# EAGLE board 1 Strain Gauge Board (EAGLE 9.1.3), part 1 of 2
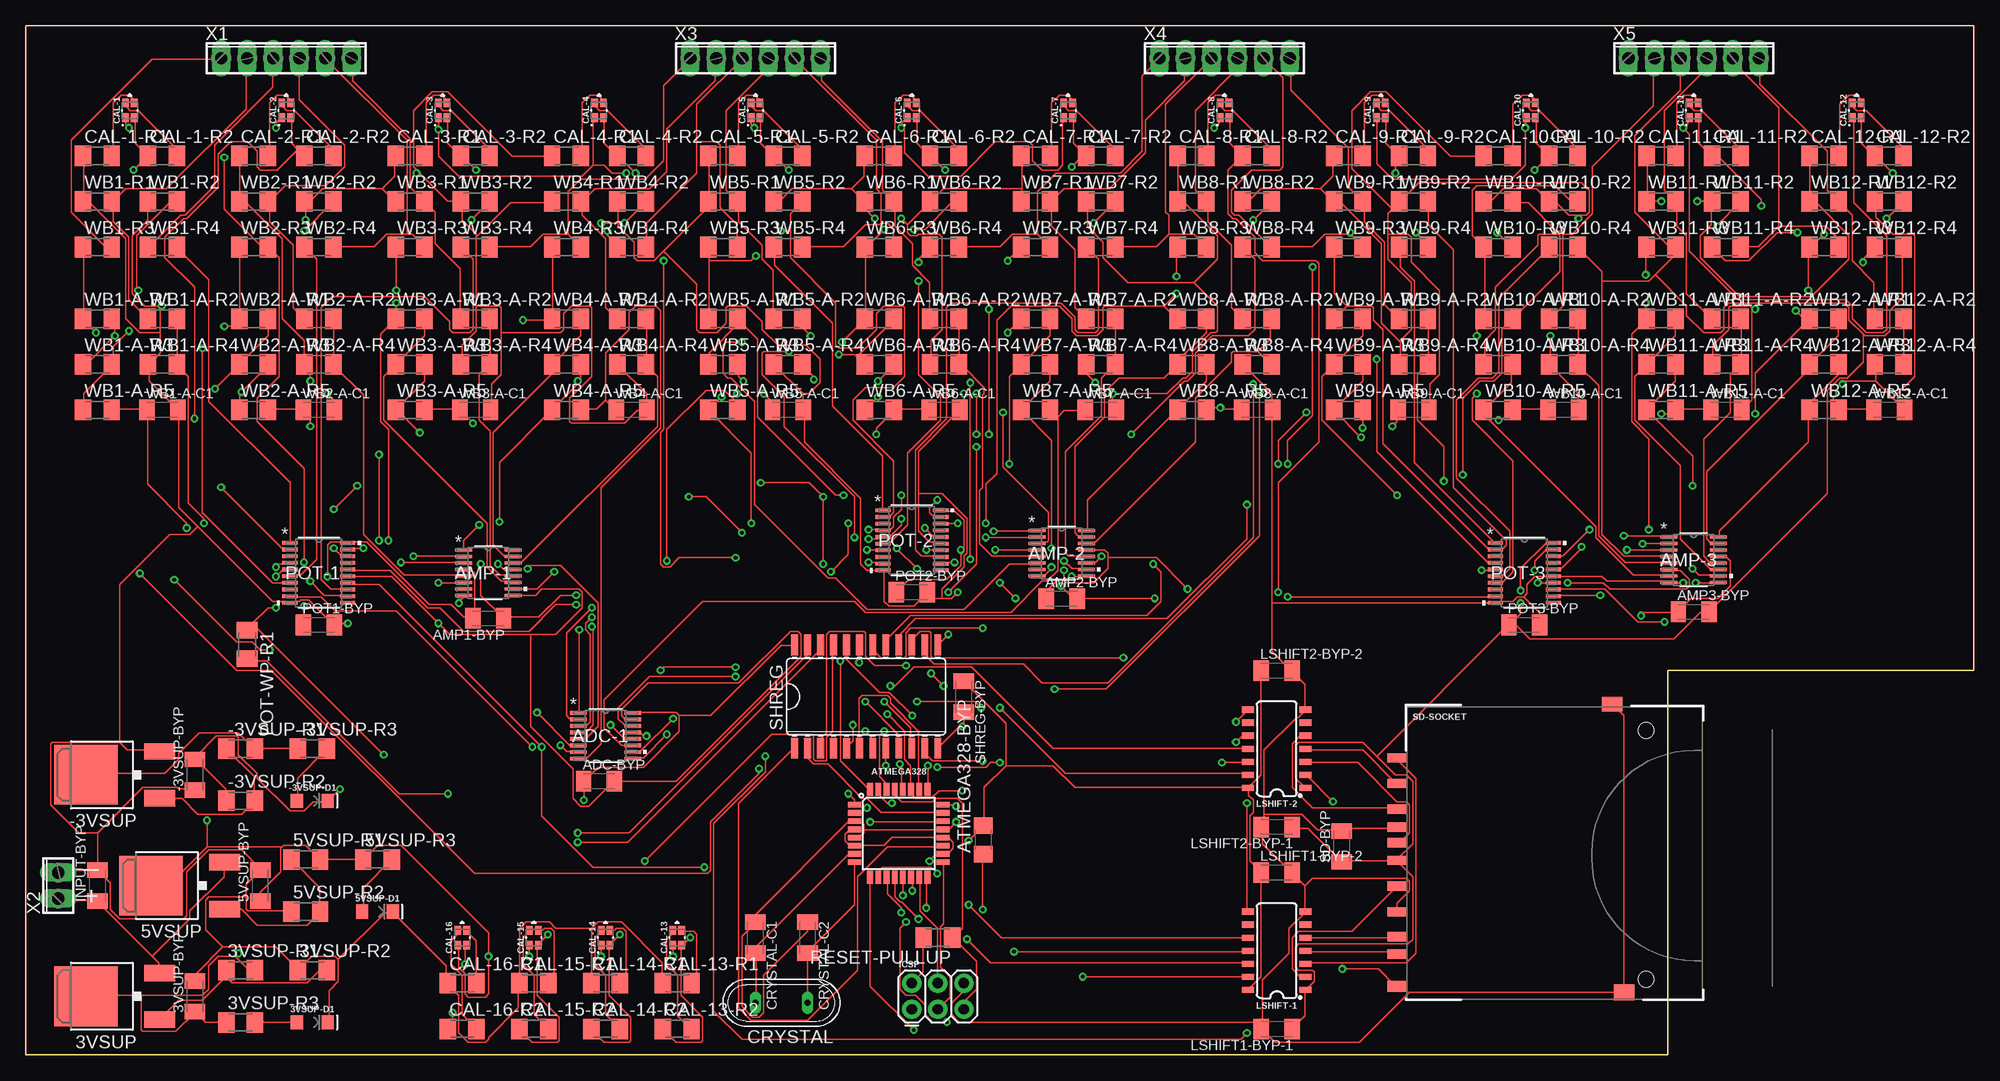
[diagram p0: board, top side]
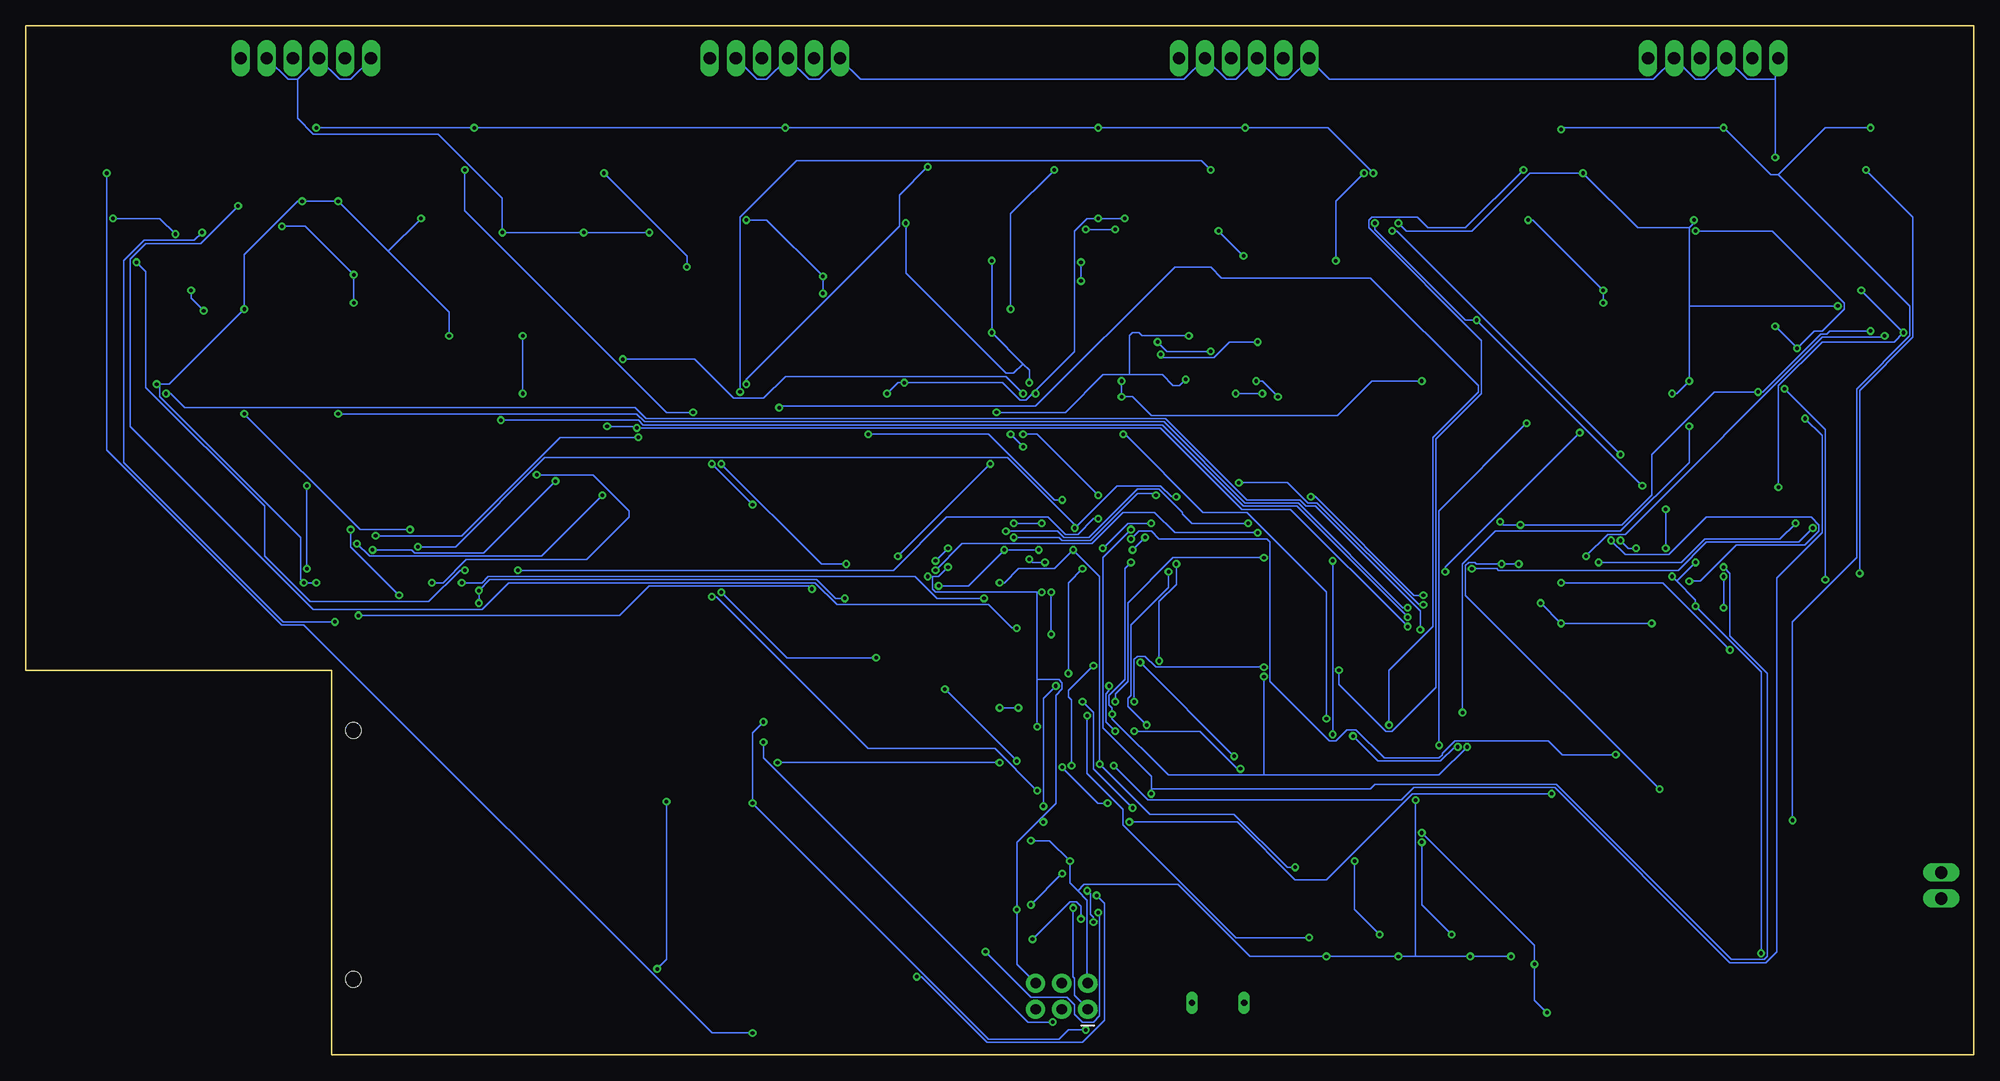
[diagram p1: board, bottom side, seen from below]

Size 189.87 x 100.33 mm. Coordinates in mm from the lower left corner, seen from the top.
Outline: 0,100 0,100.33
Outline: 0,100.33 189.87,100.33 189.87,37.47 160.02,37.47 160.02,0 0,0 0,100.33
Copper layers (1*16): Top 0.035mm / dielectric 1.5mm / Bottom 0.035mm
Design rules "default": minimum track width 6mil, minimum drill 0.35mm, track to track 6mil, track to pad 6mil, pad to pad 6mil, via to via 6mil, smd to smd 6mil, copper to edge 40mil, drill to drill 6mil, minimum pad ring 10mil, minimum via ring 8mil, stop-mask expansion 4mil, vias tented up to drill 0mil, thermal gap 10mil

## Footprints (pad centres in the part's own frame; a part is rotated, then mirrored left to right if it is on the bottom)
DPACK = smd 1.6 x 3: 1 -2.28,-4.8; 3 2.28,-4.8 | smd 5.8 x 6.2: 4 0,2.38
C1206K = smd 1.5 x 2: 1 -1.5,0; 2 1.5,0
LED-1206 = smd 1.2 x 1.4: A -1.5,0; C 1.5,0
M1206 = smd 1.6 x 2: 1 -1.4,0; 2 1.4,0
21-0055H_16 = smd 1.6 x 0.356: 1 -2.654,2.223; 2 -2.654,1.587; 3 -2.654,0.953; 4 -2.654,0.318; 5 -2.654,-0.318; 6 -2.654,-0.953; 7 -2.654,-1.587; 8 -2.654,-2.223; 9 2.654,-2.223; 10 2.654,-1.587; 11 2.654,-0.953; 12 2.654,-0.318; 13 2.654,0.318; 14 2.654,0.953; 15 2.654,1.587; 16 2.654,2.223
SSOP-16_GN-L = smd 1.676 x 0.305: 1 -2.413,2.223; 2 -2.413,1.587; 3 -2.413,0.953; 4 -2.413,0.318; 5 -2.413,-0.318; 6 -2.413,-0.953; 7 -2.413,-1.587; 8 -2.413,-2.223; 9 2.413,-2.223; 10 2.413,-1.587; 11 2.413,-0.953; 12 2.413,-0.318; 13 2.413,0.318; 14 2.413,0.953; 15 2.413,1.587; 16 2.413,2.223
TQFP32-08 = smd 1.27 x 0.559: 1 -4.293,2.8; 2 -4.293,2; 3 -4.293,1.2; 4 -4.293,0.4; 5 -4.293,-0.4; 6 -4.293,-1.2; 7 -4.293,-2; 8 -4.293,-2.8; 17 4.293,-2.8; 18 4.293,-2; 19 4.293,-1.2; 20 4.293,-0.4; 21 4.293,0.4; 22 4.293,1.2; 23 4.293,2; 24 4.293,2.8 | smd 0.559 x 1.27: 9 -2.8,-4.293; 10 -2,-4.293; 11 -1.2,-4.293; 12 -0.4,-4.293; 13 0.4,-4.293; 14 1.2,-4.293; 15 2,-4.293; 16 2.8,-4.293; 25 2.8,4.293; 26 2,4.293; 27 1.2,4.293; 28 0.4,4.293; 29 -0.4,4.293; 30 -1.2,4.293; 31 -2,4.293; 32 -2.8,4.293
C1206 = smd 1.6 x 1.8: 1 -1.4,0; 2 1.4,0
LTST-C195KGJRKT = smd 0.85 x 0.65: P$1 -0.725,0.425; P$2 -0.725,-0.425; P$3 0.725,0.425; P$4 0.725,-0.425
QS = drill 0.61 long: 1 -2.54,0; 2 2.54,0
2X3 = drill 1.016 pad 1.88: 1 0,0; 2 0,2.54; 3 2.54,0; 4 2.54,2.54; 5 5.08,0; 6 5.08,2.54
SO14 = smd 0.6 x 1.2: 1 -3.81,-2.8; 2 -2.54,-2.8; 3 -1.27,-2.8; 4 0,-2.8; 5 1.27,-2.8; 6 2.54,-2.8; 7 3.81,-2.8; 8 3.81,2.8; 9 2.54,2.8; 10 1.27,2.8; 11 0,2.8; 12 -1.27,2.8; 13 -2.54,2.8; 14 -3.81,2.8
RU_20 = smd 1.473 x 0.356: 1 -2.819,2.925; 2 -2.819,2.275; 3 -2.819,1.625; 4 -2.819,0.975; 5 -2.819,0.325; 6 -2.819,-0.325; 7 -2.819,-0.975; 8 -2.819,-1.625; 9 -2.819,-2.275; 10 -2.819,-2.925; 11 2.819,-2.925; 12 2.819,-2.275; 13 2.819,-1.625; 14 2.819,-0.975; 15 2.819,-0.325; 16 2.819,0.325; 17 2.819,0.975; 18 2.819,1.625; 19 2.819,2.275; 20 2.819,2.925
SD = smd 1.8 x 0.9: 1 -1,6.77; 2 -1,4.27; 3 -1,2.52; 4 -1,-0.73; 5 -1,-3.23; 6 -1,-5.73; 7 -1,-8.15; 8 -1,-9.85; 9 -1,9.27; CD -1,1.02 | smd 2 x 1.4: SH@1 20,14.496 | smd 2 x 1.527: SH@2 21.15,-13.589 | smd 1.8 x 1.1: WP -1,-13 | hole 1.55: 23.3,11.94; 23.3,-12.32
SO24W = smd 0.66 x 2.032: 1 -6.985,-5.029; 2 -5.715,-5.029; 3 -4.445,-5.029; 4 -3.175,-5.029; 5 -1.905,-5.029; 6 -0.635,-5.029; 7 0.635,-5.029; 8 1.905,-5.029; 9 3.175,-5.029; 10 4.445,-5.029; 11 5.715,-5.029; 12 6.985,-5.029; 13 6.985,5.029; 14 5.715,5.029; 15 4.445,5.029; 16 3.175,5.029; 17 1.905,5.029; 18 0.635,5.029; 19 -0.635,5.029; 20 -1.905,5.029; 21 -3.175,5.029; 22 -4.445,5.029; 23 -5.715,5.029; 24 -6.985,5.029
6POL254 = drill 1.2 pad 1.778 long: 1 -6.35,0; 2 -3.81,0; 3 -1.27,0; 4 1.27,0; 5 3.81,0; 6 6.35,0
2POL254 = drill 1.2 long: 1 -1.27,0; 2 1.27,0

## Placement (x,y rotation side)
3VSUP  LM317ABDT  [DPACK]  8.26,5.71 90 top
3VSUP-BYP  .1uF  [C1206K]  16.51,5.71 90 top
3VSUP-D1  GREEN  [LED-1206]  27.94,3.17 0 top
3VSUP-R1  330  [M1206]  20.95,8.26 0 top
3VSUP-R2  462  [M1206]  27.94,8.26 0 top
3VSUP-R3  150  [M1206]  20.95,3.17 0 top
5VSUP  LM317MABDT  [DPACK]  14.61,16.51 90 top
5VSUP-BYP  .1uF  [C1206K]  22.86,16.51 90 top
5VSUP-D1  GREEN  [LED-1206]  34.29,13.97 0 top
5VSUP-R1  330  [M1206]  27.3,19.05 0 top
5VSUP-R2  990  [M1206]  27.3,13.97 0 top
5VSUP-R3  330  [M1206]  34.29,19.05 0 top
-3VSUP  LM317ABDT  [DPACK]  8.26,27.3 90 top
-3VSUP-BYP  .1uF  [C1206K]  16.51,27.3 90 top
-3VSUP-D1  GREEN  [LED-1206]  27.94,24.77 0 top
-3VSUP-R1  330  [M1206]  20.95,29.84 0 top
-3VSUP-R2  462  [M1206]  20.95,24.77 0 top
-3VSUP-R3  150  [M1206]  27.94,29.84 0 top
ADC-1  MAX11610EEE+  [21-0055H_16]  56.52,31.11 0 top
ADC-BYP  .01uF  [C1206K]  55.88,26.67 0 top
AMP1-BYP  .01uF  [C1206K]  45.09,42.55 180 top
AMP2-BYP  .01uF  [C1206K]  100.97,44.45 0 top
AMP3-BYP  .01uF  [C1206K]  162.56,43.18 0 top
AMP-1  LTC6082HGNPBFSSOP-16_GN-L  [SSOP-16_GN-L]  45.09,46.99 0 top
AMP-2  LTC6082HGNPBFSSOP-16_GN-L  [SSOP-16_GN-L]  100.97,48.9 0 top
AMP-3  LTC6082HGNPBFSSOP-16_GN-L  [SSOP-16_GN-L]  162.56,48.26 0 top
ATMEGA328  [TQFP32-08]  85.09,21.59 0 top
ATMEGA328-BYP  [C1206]  93.34,20.95 90 top
CAL-1  LED-RGLTST-C195KGJRKT  [LTST-C195KGJRKT]  10.16,92.08 90 top
CAL-1-R1  330  [M1206]  6.99,87.63 0 top
CAL-1-R2  330  [M1206]  13.34,87.63 0 top
CAL-2  LED-RGLTST-C195KGJRKT  [LTST-C195KGJRKT]  25.4,92.08 90 top
CAL-2-R1  330  [M1206]  22.23,87.63 0 top
CAL-2-R2  330  [M1206]  28.57,87.63 0 top
CAL-3  LED-RGLTST-C195KGJRKT  [LTST-C195KGJRKT]  40.64,92.08 90 top
CAL-3-R1  330  [M1206]  37.47,87.63 0 top
CAL-3-R2  330  [M1206]  43.81,87.63 0 top
CAL-4  LED-RGLTST-C195KGJRKT  [LTST-C195KGJRKT]  55.88,92.08 90 top
CAL-4-R1  330  [M1206]  52.7,87.63 0 top
CAL-4-R2  330  [M1206]  59.05,87.63 0 top
CAL-5  LED-RGLTST-C195KGJRKT  [LTST-C195KGJRKT]  71.12,92.08 90 top
CAL-5-R1  330  [M1206]  67.94,87.63 0 top
CAL-5-R2  330  [M1206]  74.3,87.63 0 top
CAL-6  LED-RGLTST-C195KGJRKT  [LTST-C195KGJRKT]  86.36,92.08 90 top
CAL-6-R1  330  [M1206]  83.19,87.63 0 top
CAL-6-R2  330  [M1206]  89.53,87.63 0 top
CAL-7  LED-RGLTST-C195KGJRKT  [LTST-C195KGJRKT]  101.6,92.08 90 top
CAL-7-R1  330  [M1206]  98.42,87.63 0 top
CAL-7-R2  330  [M1206]  104.78,87.63 0 top
CAL-8  LED-RGLTST-C195KGJRKT  [LTST-C195KGJRKT]  116.84,92.08 90 top
CAL-8-R1  330  [M1206]  113.67,87.63 0 top
CAL-8-R2  330  [M1206]  120.02,87.63 0 top
CAL-9  LED-RGLTST-C195KGJRKT  [LTST-C195KGJRKT]  132.08,92.08 90 top
CAL-9-R1  330  [M1206]  128.91,87.63 0 top
CAL-9-R2  330  [M1206]  135.25,87.63 0 top
CAL-10  LED-RGLTST-C195KGJRKT  [LTST-C195KGJRKT]  146.69,92.08 90 top
CAL-10-R1  330  [M1206]  143.51,87.63 0 top
CAL-10-R2  330  [M1206]  149.86,87.63 0 top
CAL-11  LED-RGLTST-C195KGJRKT  [LTST-C195KGJRKT]  162.56,92.08 90 top
CAL-11-R1  330  [M1206]  159.38,87.63 0 top
CAL-11-R2  330  [M1206]  165.74,87.63 0 top
CAL-12  LED-RGLTST-C195KGJRKT  [LTST-C195KGJRKT]  178.44,92.08 90 top
CAL-12-R1  330  [M1206]  175.26,87.63 0 top
CAL-12-R2  330  [M1206]  181.61,87.63 0 top
CAL-13  LED-RGLTST-C195KGJRKT  [LTST-C195KGJRKT]  63.5,11.43 90 top
CAL-13-R1  330  [M1206]  63.5,6.99 0 top
CAL-13-R2  330  [M1206]  63.5,2.54 0 top
CAL-14  LED-RGLTST-C195KGJRKT  [LTST-C195KGJRKT]  56.52,11.43 90 top
CAL-14-R1  330  [M1206]  56.52,6.99 0 top
CAL-14-R2  330  [M1206]  56.52,2.54 0 top
CAL-15  LED-RGLTST-C195KGJRKT  [LTST-C195KGJRKT]  49.53,11.43 90 top
CAL-15-R1  330  [M1206]  49.53,6.99 0 top
CAL-15-R2  330  [M1206]  49.53,2.54 0 top
CAL-16  LED-RGLTST-C195KGJRKT  [LTST-C195KGJRKT]  42.55,11.43 90 top
CAL-16-R1  330  [M1206]  42.55,6.99 0 top
CAL-16-R2  330  [M1206]  42.55,2.54 0 top
CRYSTAL  16MHz  [QS]  73.66,5.08 180 top
CRYSTAL-C1  22pF  [C1206K]  71.12,11.43 270 top
CRYSTAL-C2  22pF  [C1206K]  76.2,11.43 270 top
ICSP  [2X3]  86.36,4.45 0 top
INPUT-BYP  .1uF  [C1206K]  6.99,16.51 90 top
LSHIFT1-BYP-1  .01uF  [C1206K]  121.92,2.54 180 top
LSHIFT1-BYP-2  .01uF  [C1206K]  121.92,17.78 0 top
LSHIFT2-BYP-1  .01uF  [C1206K]  121.92,22.23 180 top
LSHIFT2-BYP-2  .01uF  [C1206K]  121.92,37.47 0 top
LSHIFT-1  TXB0104  [SO14]  121.92,10.16 90 top
LSHIFT-2  TXB0104  [SO14]  121.92,29.84 90 top
POT1-BYP  .01uF  [C1206K]  28.57,41.91 0 top
POT2-BYP  .01uF  [C1206K]  86.36,45.09 0 top
POT3-BYP  .01uF  [C1206K]  146.05,41.91 0 top
POT-1  AD5254BRUZ1  [RU_20]  28.57,46.99 0 top
POT-2  AD5254BRUZ1  [RU_20]  86.36,50.16 0 top
POT-3  AD5254BRUZ1  [RU_20]  146.05,46.99 0 top
POT-WP-R1  100  [M1206]  21.59,40.01 270 top
RESET-PULLUP  10k  [M1206]  88.9,11.43 180 top
SD-BYP  .01uF  [C1206K]  128.27,20.32 90 top
SD-SOCKET  SD_CARD_SOCKET  [SD]  134.62,19.68 0 top
SHREG  74LS674DW  [SO24W]  81.92,34.92 0 top
SHREG-BYP  .01uF  [C1206K]  91.44,34.92 270 top
WB1-A-C1  100nF  [C1206K]  13.34,62.87 0 top
WB1-A-R1  1k  [M1206]  6.99,71.75 0 top
WB1-A-R2  1k  [M1206]  13.34,71.75 0 top
WB1-A-R3  1M  [M1206]  6.99,67.31 0 top
WB1-A-R4  1M  [M1206]  13.34,67.31 0 top
WB1-A-R5  100k  [M1206]  6.99,62.87 0 top
WB1-R1  350  [M1206]  6.99,83.19 0 top
WB1-R2  350  [M1206]  13.34,83.19 0 top
WB1-R3  370  [M1206]  6.99,78.74 0 top
WB1-R4  5k  [M1206]  13.34,78.74 0 top
WB2-A-C1  100nF  [C1206K]  28.57,62.87 0 top
WB2-A-R1  1k  [M1206]  22.23,71.75 0 top
WB2-A-R2  1k  [M1206]  28.57,71.75 0 top
WB2-A-R3  1M  [M1206]  22.23,67.31 0 top
WB2-A-R4  1M  [M1206]  28.57,67.31 0 top
WB2-A-R5  100k  [M1206]  22.23,62.87 0 top
WB2-R1  350  [M1206]  22.23,83.19 0 top
WB2-R2  350  [M1206]  28.57,83.19 0 top
WB2-R3  370  [M1206]  22.23,78.74 0 top
WB2-R4  5k  [M1206]  28.57,78.74 0 top
WB3-A-C1  100nF  [C1206K]  43.81,62.87 0 top
WB3-A-R1  1k  [M1206]  37.47,71.75 0 top
WB3-A-R2  1k  [M1206]  43.81,71.75 0 top
WB3-A-R3  1M  [M1206]  37.47,67.31 0 top
WB3-A-R4  1M  [M1206]  43.81,67.31 0 top
WB3-A-R5  100k  [M1206]  37.47,62.87 0 top
WB3-R1  350  [M1206]  37.47,83.19 0 top
WB3-R2  350  [M1206]  43.81,83.19 0 top
WB3-R3  370  [M1206]  37.47,78.74 0 top
WB3-R4  5k  [M1206]  43.81,78.74 0 top
WB4-A-C1  100nF  [C1206K]  59.05,62.87 0 top
WB4-A-R1  1k  [M1206]  52.7,71.75 0 top
WB4-A-R2  1k  [M1206]  59.05,71.75 0 top
WB4-A-R3  1M  [M1206]  52.7,67.31 0 top
WB4-A-R4  1M  [M1206]  59.05,67.31 0 top
WB4-A-R5  100k  [M1206]  52.7,62.87 0 top
WB4-R1  350  [M1206]  52.7,83.19 0 top
WB4-R2  350  [M1206]  59.05,83.19 0 top
WB4-R3  370  [M1206]  52.7,78.74 0 top
WB4-R4  5k  [M1206]  59.05,78.74 0 top
WB5-A-C1  100nF  [C1206K]  74.3,62.87 0 top
WB5-A-R1  1k  [M1206]  67.94,71.75 0 top
WB5-A-R2  1k  [M1206]  74.3,71.75 0 top
WB5-A-R3  1M  [M1206]  67.94,67.31 0 top
WB5-A-R4  1M  [M1206]  74.3,67.31 0 top
WB5-A-R5  100k  [M1206]  67.94,62.87 0 top
WB5-R1  350  [M1206]  67.94,83.19 0 top
WB5-R2  350  [M1206]  74.3,83.19 0 top
WB5-R3  370  [M1206]  67.94,78.74 0 top
WB5-R4  5k  [M1206]  74.3,78.74 0 top
WB6-A-C1  100nF  [C1206K]  89.53,62.87 0 top
WB6-A-R1  1k  [M1206]  83.19,71.75 0 top
WB6-A-R2  1k  [M1206]  89.53,71.75 0 top
WB6-A-R3  1M  [M1206]  83.19,67.31 0 top
WB6-A-R4  1M  [M1206]  89.53,67.31 0 top
WB6-A-R5  100k  [M1206]  83.19,62.87 0 top
WB6-R1  350  [M1206]  83.19,83.19 0 top
WB6-R2  350  [M1206]  89.53,83.19 0 top
WB6-R3  370  [M1206]  83.19,78.74 0 top
WB6-R4  5k  [M1206]  89.53,78.74 0 top
WB7-A-C1  100nF  [C1206K]  104.78,62.87 0 top
WB7-A-R1  1k  [M1206]  98.42,71.75 0 top
WB7-A-R2  1k  [M1206]  104.78,71.75 0 top
WB7-A-R3  1M  [M1206]  98.42,67.31 0 top
WB7-A-R4  1M  [M1206]  104.78,67.31 0 top
WB7-A-R5  100k  [M1206]  98.42,62.87 0 top
WB7-R1  350  [M1206]  98.42,83.19 0 top
WB7-R2  350  [M1206]  104.78,83.19 0 top
WB7-R3  370  [M1206]  98.42,78.74 0 top
WB7-R4  5k  [M1206]  104.78,78.74 0 top
WB8-A-C1  100nF  [C1206K]  120.02,62.87 0 top
WB8-A-R1  1k  [M1206]  113.67,71.75 0 top
WB8-A-R2  1k  [M1206]  120.02,71.75 0 top
WB8-A-R3  1M  [M1206]  113.67,67.31 0 top
WB8-A-R4  1M  [M1206]  120.02,67.31 0 top
WB8-A-R5  100k  [M1206]  113.67,62.87 0 top
WB8-R1  350  [M1206]  113.67,83.19 0 top
WB8-R2  350  [M1206]  120.02,83.19 0 top
WB8-R3  370  [M1206]  113.67,78.74 0 top
WB8-R4  5k  [M1206]  120.02,78.74 0 top
WB9-A-C1  100nF  [C1206K]  135.25,62.87 0 top
WB9-A-R1  1k  [M1206]  128.91,71.75 0 top
WB9-A-R2  1k  [M1206]  135.25,71.75 0 top
WB9-A-R3  1M  [M1206]  128.91,67.31 0 top
WB9-A-R4  1M  [M1206]  135.25,67.31 0 top
WB9-A-R5  100k  [M1206]  128.91,62.87 0 top
WB9-R1  350  [M1206]  128.91,83.19 0 top
WB9-R2  350  [M1206]  135.25,83.19 0 top
WB9-R3  370  [M1206]  128.91,78.74 0 top
WB9-R4  5k  [M1206]  135.25,78.74 0 top
WB10-A-C1  100nF  [C1206K]  149.86,62.87 0 top
WB10-A-R1  1k  [M1206]  143.51,71.75 0 top
WB10-A-R2  1k  [M1206]  149.86,71.75 0 top
WB10-A-R3  1M  [M1206]  143.51,67.31 0 top
WB10-A-R4  1M  [M1206]  149.86,67.31 0 top
WB10-A-R5  100k  [M1206]  143.51,62.87 0 top
WB10-R1  350  [M1206]  143.51,83.19 0 top
WB10-R2  350  [M1206]  149.86,83.19 0 top
WB10-R3  370  [M1206]  143.51,78.74 0 top
WB10-R4  5k  [M1206]  149.86,78.74 0 top
WB11-A-C1  100nF  [C1206K]  165.74,62.87 0 top
WB11-A-R1  1k  [M1206]  159.38,71.75 0 top
WB11-A-R2  1k  [M1206]  165.74,71.75 0 top
WB11-A-R3  1M  [M1206]  159.38,67.31 0 top
WB11-A-R4  1M  [M1206]  165.74,67.31 0 top
WB11-A-R5  100k  [M1206]  159.38,62.87 0 top
WB11-R1  350  [M1206]  159.38,83.19 0 top
WB11-R2  350  [M1206]  165.74,83.19 0 top
WB11-R3  370  [M1206]  159.38,78.74 0 top
WB11-R4  5k  [M1206]  165.74,78.74 0 top
WB12-A-C1  100nF  [C1206K]  181.61,62.87 0 top
WB12-A-R1  1k  [M1206]  175.26,71.75 0 top
WB12-A-R2  1k  [M1206]  181.61,71.75 0 top
WB12-A-R3  1M  [M1206]  175.26,67.31 0 top
WB12-A-R4  1M  [M1206]  181.61,67.31 0 top
WB12-A-R5  100k  [M1206]  175.26,62.87 0 top
WB12-R1  350  [M1206]  175.26,83.19 0 top
WB12-R2  350  [M1206]  181.61,83.19 0 top
WB12-R3  370  [M1206]  175.26,78.74 0 top
WB12-R4  5k  [M1206]  181.61,78.74 0 top
X1  [6POL254]  25.4,97.16 0 top
X2  [2POL254]  3.17,16.51 90 top
X3  [6POL254]  71.12,97.16 0 top
X4  [6POL254]  116.84,97.16 0 top
X5  [6POL254]  162.56,97.16 0 top

## Library data of the parts
3VSUP 5VSUP -3VSUP = v-reg
3VSUP-BYP 3VSUP-R1-3VSUP-R3 5VSUP-BYP 5VSUP-R1-5VSUP-R3 ADC-BYP CAL-1-R1 CAL-1-R2 CAL-2-R1 CAL-2-R2 CAL-3-R1 CAL-3-R2 CAL-4-R1 CAL-4-R2 CAL-5-R1 CAL-5-R2 CAL-6-R1 CAL-6-R2 CAL-7-R1 CAL-7-R2 CAL-8-R1 CAL-8-R2 CAL-9-R1 CAL-9-R2 CAL-10-R1 CAL-10-R2 CAL-11-R1 CAL-11-R2 CAL-12-R1 CAL-12-R2 CAL-13-R1 CAL-13-R2 CAL-14-R1 CAL-14-R2 CAL-15-R1 CAL-15-R2 CAL-16-R1 CAL-16-R2 CRYSTAL-C1 CRYSTAL-C2 LSHIFT1-BYP-1 LSHIFT1-BYP-2 LSHIFT2-BYP-1 LSHIFT2-BYP-2 POT1-BYP POT2-BYP POT3-BYP SD-BYP SHREG-BYP WB1-R1-WB1-R4 = resistor
3VSUP-D1 5VSUP-D1 -3VSUP-D1 = SparkFun-LED; PROD_ID: DIO-00862
-3VSUP-BYP AMP1-BYP AMP2-BYP AMP3-BYP ATMEGA328-BYP INPUT-BYP WB1-A-C1 WB2-A-C1 WB3-A-C1 WB4-A-C1 WB5-A-C1 WB6-A-C1 WB7-A-C1 WB8-A-C1 WB9-A-C1 WB10-A-C1 WB11-A-C1 WB12-A-C1 = rcl; SPICEPREFIX: C
-3VSUP-R1--3VSUP-R3 POT-WP-R1 RESET-PULLUP WB1-A-R1-WB1-A-R5 WB2-A-R1-WB2-A-R5 WB2-R1-WB2-R4 WB3-A-R1-WB3-A-R5 WB3-R1-WB3-R4 WB4-A-R1-WB4-A-R5 WB4-R1-WB4-R4 WB5-A-R1-WB5-A-R5 WB5-R1-WB5-R4 WB6-A-R1-WB6-A-R5 WB6-R1-WB6-R4 WB7-A-R1-WB7-A-R5 WB7-R1-WB7-R4 WB8-A-R1-WB8-A-R5 WB8-R1-WB8-R4 WB9-A-R1-WB9-A-R5 WB9-R1-WB9-R4 WB10-A-R1-WB10-A-R5 WB10-R1-WB10-R4 WB11-A-R1-WB11-A-R5 WB11-R1-WB11-R4 WB12-A-R1-WB12-A-R5 WB12-R1-WB12-R4 = rcl; SPICEPREFIX: R
ADC-1 = MAX11610 10 bit ADC; MANUFACTURER_PART_NUMBER: MAX11610EEE+; VENDOR: Maxim Integrated Products
AMP-1-AMP-3 = LTC6082 Strain Gauge Amplifier; MANUFACTURER_PART_NUMBER: LTC6082HGN#PBF; VENDOR: Linear Technology
ATMEGA328 = SparkFun-IC-Microcontroller; PROD_ID: IC-09069
CAL-1-CAL-16 = SparkFun-LED; PROD_ID: DIO-12140
CRYSTAL = special
ICSP = SparkFun-Connectors; PROD_ID: CONN-11566
LSHIFT-1 LSHIFT-2 = SparkFun-IC-Comms; PROD_ID: IC-11329
POT-1-POT-3 = AD5254 4x1k Digital Potentiometer; MANUFACTURER_PART_NUMBER: AD5254BRUZ1; VENDOR: Analog Devices Inc
SD-SOCKET = SparkFun-Connectors; PROD_ID: CONN-11976; SF_ID: PRT-12769
SHREG = 74xx-eu
X1-X5 = con-phoenix-254; OC_FARNELL: unknown; OC_NEWARK: unknown

## Nets
+3V: 3VSUP-BYP.1 3VSUP-R1.2 3VSUP-R3.1 3VSUP.4 AMP1-BYP.2 AMP2-BYP.2 AMP3-BYP.2 AMP-1.4 AMP-2.4 AMP-3.4 LSHIFT1-BYP-1.1 LSHIFT2-BYP-1.1 LSHIFT-1.1 LSHIFT-2.1 POT1-BYP.1 POT2-BYP.1 POT3-BYP.1 POT-1.20 POT-2.20 POT-3.20 SD-BYP.1 SD-SOCKET.4 WB1-R3.2 WB1-R4.1 WB2-R3.2 WB2-R4.2 WB3-R3.2 WB3-R4.2 WB4-R3.2 WB4-R4.2 WB5-R3.2 WB5-R4.2 WB6-R3.2 WB6-R4.2 WB7-R3.2 WB7-R4.2 WB8-R3.2 WB8-R4.2 WB9-R3.2 WB9-R4.2 WB10-R3.2 WB10-R4.2 WB11-R3.2 WB11-R4.2 WB12-R3.2 WB12-R4.2 X1.1 X1.3 X1.5 X3.1 X3.3 X3.5 X4.1 X4.3 X4.5 X5.1 X5.3 X5.5
+5V: 5VSUP-BYP.1 5VSUP-R1.2 5VSUP-R3.1 5VSUP.4 ADC-1.16 ADC-BYP.1 ATMEGA328-BYP.2 ATMEGA328.4 ATMEGA328.6 ATMEGA328.18 ATMEGA328.20 CAL-1.P$1 CAL-2.P$1 CAL-3.P$1 CAL-4.P$1 CAL-5.P$1 CAL-6.P$1 CAL-7.P$1 CAL-8.P$1 CAL-9.P$1 CAL-10.P$1 CAL-11.P$1 CAL-12.P$1 CAL-13.P$1 CAL-14.P$1 CAL-15.P$1 CAL-16.P$1 ICSP.2 LSHIFT1-BYP-2.1 LSHIFT2-BYP-2.1 LSHIFT-1.14 LSHIFT-2.14 RESET-PULLUP.2 SHREG-BYP.1 SHREG.24
-3V: -3VSUP-R1.2 -3VSUP-R3.1 -3VSUP.4
GND: 3VSUP-BYP.2 3VSUP-D1.C 3VSUP-R2.1 5VSUP-BYP.2 5VSUP-D1.C 5VSUP-R2.1 -3VSUP-BYP.1 -3VSUP.3 ADC-1.15 ADC-BYP.2 AMP-1.8 AMP-1.9 AMP-2.8 AMP-2.9 AMP-3.8 AMP-3.9 ATMEGA328-BYP.1 ATMEGA328.3 ATMEGA328.5 ATMEGA328.21 CAL-1-R1.1 CAL-2-R1.1 CAL-3-R1.1 CAL-4-R1.1 CAL-5-R1.1 CAL-6-R1.1 CAL-7-R1.1 CAL-8-R1.1 CAL-9-R1.1 CAL-10-R1.1 CAL-11-R1.1 CAL-12-R1.1 CAL-13-R1.1 CAL-14-R1.1 CAL-15-R1.1 CAL-16-R1.1 CRYSTAL-C1.1 CRYSTAL-C2.1 ICSP.6 INPUT-BYP.2 LSHIFT1-BYP-1.2 LSHIFT1-BYP-2.2 LSHIFT2-BYP-1.2 LSHIFT2-BYP-2.2 LSHIFT-1.7 LSHIFT-2.7 POT1-BYP.2 POT2-BYP.2 POT3-BYP.2 POT-1.10 POT-1.15 POT-2.10 POT-2.15 POT-3.10 POT-3.15 SD-BYP.2 SD-SOCKET.3 SD-SOCKET.6 SD-SOCKET.SH@1 SD-SOCKET.SH@2 SHREG-BYP.2 SHREG.12 WB1-A-C1.2 WB1-A-R4.1 WB1-R1.1 WB1-R2.1 WB2-A-C1.2 WB2-A-R4.1 WB2-R1.1 WB2-R2.1 WB3-A-C1.2 WB3-A-R4.1 WB3-R1.1 WB3-R2.1 WB4-A-C1.2 WB4-A-R4.1 WB4-R1.1 WB4-R2.1 WB5-A-C1.2 WB5-A-R4.1 WB5-R1.1 WB5-R2.1 WB6-A-C1.2 WB6-A-R4.1 WB6-R1.1 WB6-R2.1 WB7-A-C1.2 WB7-A-R4.1 WB7-R1.1 WB7-R2.1 WB8-A-C1.2 WB8-A-R4.1 WB8-R1.1 WB8-R2.1 WB9-A-C1.2 WB9-A-R4.1 WB9-R1.1 WB9-R2.1 WB10-A-C1.2 WB10-A-R4.1 WB10-R1.1 WB10-R2.1 WB11-A-C1.2 WB11-A-R4.1 WB11-R1.1 WB11-R2.1 WB12-A-C1.2 WB12-A-R4.1 WB12-R1.1 WB12-R2.1 X2.2
LSHIFT-OE: ATMEGA328.9 LSHIFT-1.8 LSHIFT-2.8
MISO: ATMEGA328.16 ICSP.1
MOSI: ATMEGA328.15 ICSP.4
N$1: -3VSUP-D1.A -3VSUP-R3.2
N$2: -3VSUP-R1.1 -3VSUP-R2.2 -3VSUP.1
N$5: ATMEGA328.22 POT-WP-R1.2
N$12: 3VSUP-R1.1 3VSUP-R2.2 3VSUP.1
N$13: LSHIFT-2.4 SD-SOCKET.1
N$14: 5VSUP-R1.1 5VSUP-R2.2 5VSUP.1
N$15: LSHIFT-2.2 SD-SOCKET.WP
N$17: LSHIFT-2.3 SD-SOCKET.CD
N$18: LSHIFT-2.5 SD-SOCKET.2
N$19: ATMEGA328.7 CRYSTAL-C1.2 CRYSTAL.2
N$20: ATMEGA328.8 CRYSTAL-C2.2 CRYSTAL.1
N$21: LSHIFT-1.2 SD-SOCKET.5
N$22: LSHIFT-1.3 SD-SOCKET.9
N$23: LSHIFT-1.4 SD-SOCKET.8
N$24: LSHIFT-1.5 SD-SOCKET.7
N$25: CAL-1-R1.2 CAL-1.P$4
N$26: CAL-1-R2.2 CAL-1.P$3
N$27: CAL-1-R2.1 CAL-1.P$2 SHREG.7
N$28: ATMEGA328.2 LSHIFT-2.13
N$29: ATMEGA328.31 LSHIFT-2.12
N$30: ATMEGA328.30 LSHIFT-2.11
N$31: ATMEGA328.14 LSHIFT-2.10
N$32: ATMEGA328.13 LSHIFT-1.13
N$33: ATMEGA328.12 LSHIFT-1.12
N$34: ATMEGA328.11 LSHIFT-1.11
N$35: ATMEGA328.10 LSHIFT-1.10
N$36: ATMEGA328.26 SHREG.6
N$37: ATMEGA328.23 SHREG.2
N$38: ATMEGA328.24 SHREG.5
N$39: ATMEGA328.25 SHREG.3
N$40: ATMEGA328.19 SHREG.1
N$41: CAL-2-R1.2 CAL-2.P$4
N$42: CAL-2-R2.2 CAL-2.P$3
N$43: 3VSUP-D1.A 3VSUP-R3.2
N$44: 5VSUP-D1.A 5VSUP-R3.2
N$45: CAL-2-R2.1 CAL-2.P$2 SHREG.8
N$46: CAL-5-R1.2 CAL-5.P$4
N$47: CAL-5-R2.2 CAL-5.P$3
N$48: CAL-5-R2.1 CAL-5.P$2 SHREG.11
N$49: CAL-8-R1.2 CAL-8.P$4
N$50: CAL-8-R2.2 CAL-8.P$3
N$51: CAL-8-R2.1 CAL-8.P$2 SHREG.15
N$52: CAL-6-R1.2 CAL-6.P$4
N$53: CAL-6-R2.2 CAL-6.P$3
N$54: CAL-6-R2.1 CAL-6.P$2 SHREG.13
N$55: CAL-3-R1.2 CAL-3.P$4
N$56: CAL-3-R2.2 CAL-3.P$3
N$57: CAL-3-R2.1 CAL-3.P$2 SHREG.9
N$58: CAL-9-R1.2 CAL-9.P$4
N$59: CAL-9-R2.2 CAL-9.P$3
N$60: CAL-9-R2.1 CAL-9.P$2 SHREG.16
N$61: CAL-11-R1.2 CAL-11.P$4
N$62: CAL-11-R2.2 CAL-11.P$3
N$63: CAL-11-R2.1 CAL-11.P$2 SHREG.18
N$64: CAL-12-R1.2 CAL-12.P$4
N$65: CAL-12-R2.2 CAL-12.P$3
N$66: CAL-12-R2.1 CAL-12.P$2 SHREG.19
N$67: CAL-14-R1.2 CAL-14.P$4
N$68: CAL-14-R2.2 CAL-14.P$3
N$69: CAL-14-R2.1 CAL-14.P$2 SHREG.21
N$70: CAL-15-R1.2 CAL-15.P$4
N$71: CAL-15-R2.2 CAL-15.P$3
N$72: CAL-15-R2.1 CAL-15.P$2 SHREG.22
N$73: CAL-7-R1.2 CAL-7.P$4
N$74: CAL-7-R2.2 CAL-7.P$3
N$75: CAL-7-R2.1 CAL-7.P$2 SHREG.14
N$76: CAL-10-R1.2 CAL-10.P$4
N$77: CAL-10-R2.2 CAL-10.P$3
N$78: CAL-10-R2.1 CAL-10.P$2 SHREG.17
N$79: CAL-13-R1.2 CAL-13.P$4
N$80: CAL-13-R2.2 CAL-13.P$3
N$81: CAL-13-R2.1 CAL-13.P$2 SHREG.20
N$82: CAL-16-R1.2 CAL-16.P$4
N$83: CAL-16-R2.2 CAL-16.P$3
N$84: CAL-16-R2.1 CAL-16.P$2 SHREG.23
N$85: CAL-4-R1.2 CAL-4.P$4
N$86: CAL-4-R2.2 CAL-4.P$3
N$87: CAL-4-R2.1 CAL-4.P$2 SHREG.10
POT-SELECT-AD0: ATMEGA328.1 POT-1.4 POT-2.4 POT-3.4
POT-SELECT-AD1: ATMEGA328.32 POT-1.16 POT-2.16 POT-3.16
POT-WP: POT-1.5 POT-2.5 POT-3.5 POT-WP-R1.1
RESET: ATMEGA328.29 ICSP.5 RESET-PULLUP.1
SCK: ATMEGA328.17 ICSP.3
SCL: ADC-1.13 ATMEGA328.28 POT-1.14 POT-2.14 POT-3.14
SDA: ADC-1.14 ATMEGA328.27 POT-1.9 POT-2.9 POT-3.9
SG1-AIN: ADC-1.5 WB1-A-C1.1 WB1-A-R5.2
SG1-NEG: WB1-A-R2.1 WB1-R1.2 X1.2
SG1-POS: POT-1.2 WB1-A-R1.1 WB1-R2.2 WB1-R3.1
SG1-POT: POT-1.1 WB1-R4.2
SG2-AIN: ADC-1.6 WB2-A-C1.1 WB2-A-R5.2
SG2-NEG: WB2-A-R2.1 WB2-R1.2 X1.4
SG2-POS: POT-1.7 WB2-A-R1.1 WB2-R2.2 WB2-R3.1
SG2-POT: POT-1.6 WB2-R4.1
SG3-AIN: ADC-1.7 WB3-A-C1.1 WB3-A-R5.2
SG3-NEG: WB3-A-R2.1 WB3-R1.2 X1.6
SG3-POS: POT-1.12 WB3-A-R1.1 WB3-R2.2 WB3-R3.1
SG3-POT: POT-1.13 WB3-R4.1
SG4-AIN: ADC-1.8 WB4-A-C1.1 WB4-A-R5.2
SG4-NEG: WB4-A-R2.1 WB4-R1.2 X3.2
SG4-POS: POT-1.18 WB4-A-R1.1 WB4-R2.2 WB4-R3.1
SG4-POT: POT-1.19 WB4-R4.1
SG5-AIN: ADC-1.9 WB5-A-C1.1 WB5-A-R5.2
SG5-NEG: WB5-A-R2.1 WB5-R1.2 X3.4
SG5-POS: POT-2.2 WB5-A-R1.1 WB5-R2.2 WB5-R3.1
SG5-POT: POT-2.1 WB5-R4.1
SG6-AIN: ADC-1.10 WB6-A-C1.1 WB6-A-R5.2
SG6-NEG: WB6-A-R2.1 WB6-R1.2 X3.6
SG6-POS: POT-2.7 WB6-A-R1.1 WB6-R2.2 WB6-R3.1
SG6-POT: POT-2.6 WB6-R4.1
SG7-AIN: ADC-1.11 WB7-A-C1.1 WB7-A-R5.2
SG7-NEG: WB7-A-R2.1 WB7-R1.2 X4.2
SG7-POS: POT-2.12 WB7-A-R1.1 WB7-R2.2 WB7-R3.1
SG7-POT: POT-2.13 WB7-R4.1
SG8-AIN: ADC-1.12 WB8-A-C1.1 WB8-A-R5.2
SG8-NEG: WB8-A-R2.1 WB8-R1.2 X4.4
SG8-POS: POT-2.18 WB8-A-R1.1 WB8-R2.2 WB8-R3.1
SG8-POT: POT-2.19 WB8-R4.1
SG9-AIN: ADC-1.4 WB9-A-C1.1 WB9-A-R5.2
SG9-NEG: WB9-A-R2.1 WB9-R1.2 X4.6
SG9-POS: POT-3.2 WB9-A-R1.1 WB9-R2.2 WB9-R3.1
SG9-POT: POT-3.1 WB9-R4.1
SG10-AIN: ADC-1.3 WB10-A-C1.1 WB10-A-R5.2
SG10-NEG: WB10-A-R2.1 WB10-R1.2 X5.2
SG10-POS: POT-3.7 WB10-A-R1.1 WB10-R2.2 WB10-R3.1
SG10-POT: POT-3.6 WB10-R4.1
SG11-AIN: ADC-1.2 WB11-A-C1.1 WB11-A-R5.2
SG11-NEG: WB11-A-R2.1 WB11-R1.2 X5.4
SG11-POS: POT-3.12 WB11-A-R1.1 WB11-R2.2 WB11-R3.1
SG11-POT: POT-3.13 WB11-R4.1
SG12-AIN: ADC-1.1 WB12-A-C1.1 WB12-A-R5.2
SG12-NEG: WB12-A-R2.1 WB12-R1.2 X5.6
SG12-POS: POT-3.18 WB12-A-R1.1 WB12-R2.2 WB12-R3.1
SG12-POT: POT-3.19 WB12-R4.1
V-: -3VSUP-BYP.2 -3VSUP-D1.C -3VSUP-R2.1 AMP1-BYP.1 AMP2-BYP.1 AMP3-BYP.1 AMP-1.13 AMP-2.13 AMP-3.13
VCC: 3VSUP.3 5VSUP.3 INPUT-BYP.1 X2.1
WB1-A-NEG: AMP-1.2 WB1-A-R1.2 WB1-A-R3.1
WB1-A-OUT: AMP-1.1 WB1-A-R3.2 WB1-A-R5.1 WB2-A-R3.2 WB2-A-R5.1 WB4-A-R3.2 WB4-A-R5.1 WB6-A-R3.2 WB6-A-R5.1
WB1-A-POS: AMP-1.3 WB1-A-R2.2 WB1-A-R4.2
WB2-A-NEG: AMP-1.6 WB2-A-R1.2 WB2-A-R3.1
WB2-A-OUT: AMP-1.7
WB2-A-POS: AMP-1.5 WB2-A-R2.2 WB2-A-R4.2
WB3-A-NEG: AMP-1.11 WB3-A-R1.2 WB3-A-R3.1
WB3-A-OUT: AMP-1.10 WB3-A-R3.2 WB3-A-R5.1
WB3-A-POS: AMP-1.12 WB3-A-R2.2 WB3-A-R4.2
WB4-A-NEG: AMP-1.15 WB4-A-R1.2 WB4-A-R3.1
WB4-A-OUT: AMP-1.16
WB4-A-POS: AMP-1.14 WB4-A-R2.2 WB4-A-R4.2
WB5-A-NEG: AMP-2.2 WB5-A-R1.2 WB5-A-R3.1
WB5-A-OUT: AMP-2.1 WB5-A-R3.2 WB5-A-R5.1
WB5-A-POS: AMP-2.3 WB5-A-R2.2 WB5-A-R4.2
WB6-A-NEG: AMP-2.6 WB6-A-R1.2 WB6-A-R3.1
WB6-A-OUT: AMP-2.7
WB6-A-POS: AMP-2.5 WB6-A-R2.2 WB6-A-R4.2
WB7-A-NEG: AMP-2.11 WB7-A-R1.2 WB7-A-R3.1
WB7-A-OUT: AMP-2.10 WB7-A-R3.2 WB7-A-R5.1
WB7-A-POS: AMP-2.12 WB7-A-R2.2 WB7-A-R4.2
WB8-A-NEG: AMP-2.15 WB8-A-R1.2 WB8-A-R3.1
WB8-A-OUT: AMP-2.16 WB8-A-R3.2 WB8-A-R5.1
WB8-A-POS: AMP-2.14 WB8-A-R2.2 WB8-A-R4.2
WB9-A-NEG: AMP-3.2 WB9-A-R1.2 WB9-A-R3.1
WB9-A-OUT: AMP-3.1 WB9-A-R3.2 WB9-A-R5.1
WB9-A-POS: AMP-3.3 WB9-A-R2.2 WB9-A-R4.2
WB10-A-NEG: AMP-3.6 WB10-A-R1.2 WB10-A-R3.1
WB10-A-OUT: AMP-3.7 WB10-A-R3.2 WB10-A-R5.1
WB10-A-POS: AMP-3.5 WB10-A-R2.2 WB10-A-R4.2
WB11-A-NEG: AMP-3.11 WB11-A-R1.2 WB11-A-R3.1
WB11-A-OUT: AMP-3.10 WB11-A-R3.2 WB11-A-R5.1
WB11-A-POS: AMP-3.12 WB11-A-R2.2 WB11-A-R4.2
WB12-A-NEG: AMP-3.15 WB12-A-R1.2 WB12-A-R3.1
WB12-A-OUT: AMP-3.16 WB12-A-R3.2 WB12-A-R5.1
WB12-A-POS: WB12-A-R2.2 WB12-A-R4.2
WB124-A-POS: AMP-3.14

## Tracks (layer width: path | path; a pad name or v marks a point on that pad's centre or on a via)
+3V  (via drill 0.35)
  Top 0.152: 31.39,49.99 33.22,49.99 39.32,43.89 41.45,43.89 42.67,42.67 43.43,42.67 AMP1-BYP.2 43.59,42.67 43.74,42.82 43.74,46.94 43.43,47.24 42.67,47.24 AMP-1.4 | v27.13,43.74 27.13,41.91 POT1-BYP.1 | v29.41,46.63 29.41,49.68 29.72,49.99 31.39,49.99 | 31.39,49.99 POT-1.20 | 3VSUP-R3.1 19.51,3.2 17.53,3.2 16.61,4.12 3VSUP-BYP.1 16.46,4.12 14.63,2.29 11.43,2.29 11.28,2.44 11.28,5.79 | 20.42,9.6 21.64,8.38 22.25,8.38 3VSUP-R1.2 | 20.42,9.6 18.75,9.6 17.83,8.69 17.83,6.4 17.22,5.79 11.28,5.79 | 11.28,5.79 5.94,5.79 3VSUP.4 | 20.42,9.6 v20.73,9.91 | WB1-R3.2 8.38,78.79 7.77,78.79 4.42,82.14 4.42,89.15 12.34,97.08 19.05,97.08 X1.1 | v19.36,87.48 19.36,82.45 23.01,78.79 23.62,78.79 WB2-R3.2 23.77,78.64 24.69,77.72 24.69,66.14 22.55,64.01 22.55,61.72 27.13,57.15 v27.13,48.01 | 37.19,80.01 37.64,80.01 38.86,78.79 WB3-R3.2 | 37.19,80.01 35.2,80.01 33.98,78.79 30.02,78.79 WB2-R4.2 | WB1-R4.1 12.04,78.79 15.09,81.84 15.54,81.84 18.44,84.73 18.44,88.7 24.08,94.34 24.08,97.08 X1.3 | 37.19,80.01 37.19,89.15 29.26,97.08 X1.5 | 83.36,81.08 83.21,80.92 81.84,80.92 79.7,78.79 75.74,78.79 WB5-R4.2 | 83.36,81.08 83.97,81.08 84.58,80.47 84.58,78.79 WB6-R3.2 | 52.88,80.01 50.44,80.01 49.23,78.79 45.26,78.79 WB3-R4.2 | 52.88,80.01 54.1,78.79 WB4-R3.2 | 65.38,89 65.38,92.66 69.8,97.08 X3.3 | 65.38,89 65.38,85.95 60.5,81.08 60.5,78.79 WB4-R4.2 | 65.38,89 67.36,89 67.67,88.7 67.67,82.6 69.34,80.92 69.34,78.79 WB5-R3.2 | 52.88,80.01 52.88,84.12 54.1,85.34 60.35,85.34 62.18,87.17 62.18,94.49 64.77,97.08 X3.1 | 83.36,81.08 83.36,83.97 82.91,84.43 82.91,89.15 74.98,97.08 X3.5 | LSHIFT1-BYP-1.1 123.44,2.59 124.66,3.81 124.66,6.25 LSHIFT-1.1 124.82,6.4 125.58,7.16 125.58,8.08 125.42,8.23 124.05,8.23 123.75,8.53 123.75,10.52 124.05,10.82 134.72,10.82 135.18,11.28 135.18,17.37 133.66,18.9 SD-SOCKET.4
  Top 0.152: 131.67,29.11 133.5,27.28 134.57,27.28 135.18,26.67 135.18,20.57 133.66,19.05 SD-SOCKET.4 | 131.67,29.11 130.3,30.48 124.05,30.48 123.75,30.18 123.75,26.98 124.66,26.06 LSHIFT-2.1 | SD-SOCKET.4 133.5,18.9 128.32,18.9 SD-BYP.1 128.17,18.9 124.97,22.1 123.44,22.1 LSHIFT2-BYP-1.1 | 91.44,49.23 91.44,49.07 91.14,48.77 91.14,47.7 89.76,46.33 86.11,46.33 84.89,45.11 POT2-BYP.1 | 91.44,49.23 91.44,52.12 90.53,53.03 89.31,53.03 POT-2.20 | v94.49,49.23 98.45,49.23 AMP-2.4 | 91.44,49.23 v91.14,49.23 | v100.89,45.72 102.11,44.5 102.41,44.5 AMP2-BYP.2 102.56,44.5 v110.03,44.5 | v145.69,45.26 145.69,47.4 148.13,49.84 148.74,49.84 POT-3.20 | v145.69,44.04 145.69,42.98 144.93,42.22 | 144.93,42.22 144.63,41.91 POT3-BYP.1 | 144.93,42.22 146.61,40.54 160.63,40.54 163.22,43.13 163.98,43.13 AMP3-BYP.2 164.13,43.28 175.56,54.71 175.56,64.77 176.78,65.99 177.55,65.99 179.07,67.51 179.07,70.26 | 144.93,42.22 POT3-BYP.1 | 131.67,29.11 144.47,41.91 POT3-BYP.1 | 129.08,80.01 126.64,80.01 125.42,78.79 121.46,78.79 WB8-R4.2 121.31,78.79 118.26,81.84 117.81,81.84 117.5,82.14 117.5,84.28 119.48,86.26 122.22,86.26 122.53,86.56 122.53,95.25 120.7,97.08 X4.5 | 129.08,80.01 130.3,78.79 WB9-R3.2 | v135.48,80.16 136.55,79.1 136.55,78.79 WB9-R4.2 | 129.08,80.01 v129.08,80.16 | v143.41,80.16 144.78,78.79 WB10-R3.2 | 111.4,80.01 110.19,78.79 106.22,78.79 WB7-R4.2 | 111.4,80.01 113.84,80.01 115.06,78.79 WB8-R3.2 | 98.6,80.01 96.16,80.01 94.94,78.79 90.98,78.79 WB6-R4.2 | 98.6,80.01 99.82,78.79 WB7-R3.2 | 98.6,80.01 98.6,84.12 100.43,85.95 106.68,85.95 108.81,88.09 108.81,95.4 110.49,97.08 X4.1
  Top 0.152: 111.4,80.01 111.4,81.84 111.1,82.14 111.1,92.66 115.52,97.08 X4.3 | 170.84,80.77 168.86,78.79 167.18,78.79 WB11-R4.2 | 170.84,80.77 175.41,80.77 176.63,79.55 176.63,78.79 WB12-R3.2 | 170.84,80.77 170.84,92.35 166.42,96.77 166.42,97.08 X5.5 | 153.62,75.44 153.62,76.35 151.33,78.64 WB10-R4.2 | 153.62,75.44 153.62,50.75 155.75,48.62 160.02,48.62 AMP-3.4 | 158.8,76.05 158.19,75.44 153.62,75.44 | 158.8,76.05 160.78,78.03 160.78,78.64 WB11-R3.2 160.78,78.79 160.17,78.79 156.82,82.14 156.82,89.61 161.24,94.03 161.24,97.08 X5.3 | 179.07,70.26 177.7,71.63 177.7,72.85 177.24,73.3 165.96,73.3 165.51,72.85 165.51,70.71 165.2,70.41 163.53,70.41 161.85,72.08 161.85,73 158.8,76.05 | 179.07,70.26 179.22,70.1 181.2,70.1 181.66,70.56 181.66,72.54 182.88,73.76 182.88,78.64 WB12-R4.2
  Bottom 0.152: v29.41,46.63 28.96,46.18 | 28.96,46.18 27.13,44.35 v27.13,43.74 20.73,37.34 v20.73,9.91 | 19.36,95.1 19.36,96.77 19.05,97.08 X1.1 | 19.36,95.1 v19.36,87.48 | 19.36,95.1 22.1,95.1 24.08,97.08 X1.3 24.23,97.08 26.21,95.1 27.13,95.1 29.11,97.08 X1.5 29.26,97.08 31.24,95.1 62.79,95.1 64.77,97.08 | 64.77,97.08 66.75,95.1 67.82,95.1 69.8,97.08 X3.3 69.95,97.08 71.93,95.1 72.85,95.1 74.83,97.08 X3.5 74.98,97.08 76.96,95.1 108.51,95.1 110.49,97.08 | 64.77,97.08 X3.1 | v27.13,48.01 28.96,46.18 | v91.14,49.23 v94.49,49.23 97.99,45.72 v100.89,45.72 | v145.69,44.04 v145.69,45.26 144.63,46.33 112.78,46.33 110.95,44.5 v110.03,44.5 | v129.08,80.16 v135.48,80.16 v143.41,80.16 143.41,83.52 149.66,89.76 161.85,89.76 163.37,91.29 163.37,95.1 | 110.49,97.08 112.47,95.1 113.54,95.1 115.52,97.08 X4.3 115.67,97.08 117.65,95.1 118.57,95.1 120.55,97.08 X4.5 | X5.1 156.21,97.08 158.19,95.1 159.26,95.1 161.24,97.08 X5.3 161.39,97.08 163.37,95.1 | 163.37,95.1 164.29,95.1 166.27,97.08 X5.5 | 110.49,97.08 X4.1
+5V  (via drill 0.35)
  Top 0.152: 95.56,28.19 93.42,26.06 93.42,22.4 ATMEGA328-BYP.2 93.27,22.25 v91.9,20.88 | 95.56,28.19 95.56,32.31 SHREG-BYP.1 | LSHIFT-1.14 119.18,6.4 120.4,7.62 120.4,17.68 LSHIFT1-BYP-2.1 120.4,17.83 119.33,18.9 119.33,23.32 119.63,23.62 119.63,24.84 119.18,25.3 119.18,25.91 LSHIFT-2.14 | LSHIFT2-BYP-2.1 120.4,37.34 120.4,27.28 119.18,26.06 LSHIFT-2.14 | 95.56,28.19 100.13,28.19 102.26,26.06 119.02,26.06 LSHIFT-2.14 | 63.7,33.07 63.4,33.38 59.28,33.38 ADC-1.16 | 63.7,33.07 63.7,31.55 60.2,28.04 55.78,28.04 54.41,26.67 | 63.7,33.07 66.75,33.07 73.61,39.93 74.83,39.93 SHREG.24 | RESET-PULLUP.2 87.48,11.43 87.48,8.08 86.41,7.01 ICSP.2 | ATMEGA328.4 80.77,21.95 80.31,21.95 79.86,21.49 79.86,20.88 80.31,20.42 80.77,20.42 ATMEGA328.6 80.92,20.42 83.67,20.42 84.43,21.18 89.31,21.18 ATMEGA328.20 89.46,21.18 89.92,21.18 90.37,20.73 90.37,20.12 89.92,19.66 89.46,19.66 ATMEGA328.18 89.31,19.51 88.7,19.51 v88.09,18.9 | 5VSUP-BYP.1 22.86,15.85 24.84,17.83 24.84,20.12 24.99,20.27 | 24.99,20.27 25.15,20.42 27.28,20.42 28.65,19.05 5VSUP-R1.2 5VSUP-R3.1 32.92,19.05 34.29,20.42 36.58,20.42 45.11,11.89 v45.11,9.6 45.11,5.94 44.81,5.64 43.13,5.64 42.82,5.94 42.82,7.92 42.22,8.53 42.22,10.67 CAL-16.P$1 | v49.07,9.6 49.07,10.67 CAL-15.P$1 | v56.08,9.6 56.08,10.67 CAL-14.P$1 | v63.09,9.6 63.09,10.67 CAL-13.P$1 | 17.68,20.27 14.02,16.61 12.34,16.61 5VSUP.4 | 24.99,20.27 17.68,20.27 | v54.41,24.84 54.41,26.67 | 54.41,26.67 ADC-BYP.1 | CAL-9.P$1 131.67,91.29 131.67,86.87 133.2,85.34 144.78,85.34 146.15,86.72 v146.15,90.37 146.15,91.29 CAL-10.P$1 | CAL-11.P$1 162,91.29 162,90.83 v161.54,90.37 162.15,89.76 162.15,78.33 166.88,73.61 177.39,73.61 178,73 178,71.78 179.38,70.41 181.05,70.41 181.36,70.71 181.36,79.86 178.16,83.06 178.16,91.29 CAL-12.P$1
  Top 0.152: v10.06,90.37 9.75,90.68 9.75,91.29 CAL-1.P$1 | v24.38,90.37 24.38,90.83 24.84,91.29 CAL-2.P$1 | 55.32,86.72 54.25,85.65 42.22,85.65 40.23,87.63 v40.23,90.22 40.23,91.29 CAL-3.P$1 | 55.32,86.72 55.32,91.29 CAL-4.P$1 | v71.02,90.37 70.71,90.68 70.71,91.29 CAL-5.P$1 | CAL-6.P$1 85.8,91.29 85.34,90.83 v85.34,90.37 85.65,90.07 85.65,87.94 87.94,85.65 91.14,85.65 94.49,89 97.84,89 98.15,88.7 98.15,87.17 99.06,86.26 100.58,86.26 101.04,86.72 101.04,91.29 CAL-7.P$1 | v115.82,90.37 116.28,90.83 116.28,91.29 CAL-8.P$1 | 55.32,86.72 56.39,86.72 57.15,85.95 v58.52,85.95 | v17.68,22.86 17.68,20.27
  Bottom 0.152: 87.33,16 88.09,16.76 v88.09,18.9 90.07,20.88 v91.9,20.88 | 87.33,16 86.41,15.09 86.41,7.01 ICSP.2 | v45.11,9.6 v49.07,9.6 54.41,9.6 | 54.41,9.6 v56.08,9.6 v63.09,9.6 70.56,9.6 77.57,16.61 86.72,16.61 87.33,16 | 54.41,9.6 v54.41,24.84 | v161.54,90.37 v146.15,90.37 v115.82,90.37 v85.34,90.37 v71.02,90.37 62.94,90.37 v58.52,85.95 | v10.06,90.37 14.48,90.37 19.05,85.8 | 19.05,85.8 19.81,85.8 v24.38,90.37 40.08,90.37 v40.23,90.22 | v17.68,22.86 17.68,42.22 11.43,48.46 11.43,64.92 6.25,70.1 6.25,73 19.05,85.8
-3V
  Top 0.152: -3VSUP-R3.1 26.52,29.87 22.4,29.87 -3VSUP-R1.2 22.25,29.87 20.73,31.39 16.92,31.39 14.94,29.41 14.94,28.8 13.56,27.43 5.94,27.43 -3VSUP.4
GND  (via drill 0.35)
  Top 0.152: 34.75,84.43 28.96,84.43 27.74,83.21 27.28,83.21 WB2-R2.1 27.28,83.06 v27.28,81.38 | 34.75,84.43 35.97,83.21 WB3-R1.1 | 34.75,84.43 35.97,85.65 35.97,87.63 CAL-3-R1.1 | v29.41,64.47 30.02,63.86 30.02,62.94 WB2-A-C1.2 | v27.74,65.68 27.74,66.75 27.28,67.21 WB2-A-R4.1 27.13,67.36 27.13,69.65 24.99,71.78 24.99,79.55 21.49,83.06 20.88,83.06 WB2-R1.1 20.88,83.21 20.88,87.63 CAL-2-R1.1 | WB4-A-R4.1 57.76,67.21 60.5,64.47 60.5,62.94 WB4-A-C1.2 60.5,62.79 59.59,62.79 58.37,61.57 53.19,61.57 53.03,61.72 53.03,64.01 55.17,66.14 55.17,72.85 55.02,73 53.19,73 52.43,72.24 52.43,70.71 52.12,70.41 46.33,70.41 | 43.89,79.7 43.89,80.01 42.52,81.38 42.52,83.06 WB3-R2.1 42.37,83.21 41.15,83.21 38.25,86.11 | 43.89,79.7 43.89,73 | 43.89,73 43.89,70.56 42.52,69.19 42.52,67.36 WB3-A-R4.1 | 46.33,70.41 46.33,72.85 46.18,73 43.89,73 | 46.33,70.41 46.33,66.29 45.41,65.38 45.41,62.94 WB3-A-C1.2 | 43.89,79.7 47.24,83.06 51.21,83.06 WB4-R1.1 | CAL-4-R1.1 47.4,87.63 41.15,93.88 39.62,93.88 37.8,92.05 37.8,86.56 38.25,86.11 | 38.25,86.11 v38.1,85.95 | 49.23,41 51.66,41 54.25,43.59 54.25,45.11 53.95,45.41 50.29,45.41 49.68,44.81 47.55,44.81 AMP-1.9 | 49.23,41 41.3,41 v40.23,42.06 35.66,46.63 31.39,46.63 POT-1.15 | v42.22,44.04 42.22,44.2 42.67,44.65 AMP-1.8 | ADC-1.15 59.13,32.77 58.37,32.77 58.06,33.07 58.06,33.68 60.66,36.27 69.49,36.27 74.52,41.3 75.29,41.3 75.59,41 75.59,38.86 63.4,26.67 ADC-BYP.2 57.3,26.67 54.86,24.23 54.1,24.23 53.34,24.99 53.34,27.89 49.23,32 49.23,41 | 55.17,12.34 55.17,7.01 CAL-14-R1.1 | 55.17,12.34 55.78,12.95 58.06,12.95 62.03,8.99 62.03,7.01 CAL-13-R1.1
  Top 0.152: 21.49,15.39 21.49,16.61 22.86,17.98 5VSUP-BYP.2 22.86,18.14 21.03,19.96 17.83,19.96 15.7,17.83 15.7,13.56 15.39,13.26 9.14,13.26 8.23,14.17 8.23,16.76 7.01,17.98 INPUT-BYP.2 | 21.49,15.39 21.49,14.17 21.64,14.02 25.76,14.02 5VSUP-R2.1 | 30.48,9.3 30.48,7.16 29.57,6.25 29.57,3.2 3VSUP-D1.C | 30.48,9.3 30.18,9.6 27.89,9.6 26.67,8.38 3VSUP-R2.1 26.52,8.38 24.38,10.52 19.2,10.52 | 30.48,9.3 35.05,13.87 35.66,13.87 5VSUP-D1.C 35.81,13.87 41,8.69 41,7.01 CAL-16-R1.1 41.15,6.86 42.22,5.79 42.22,2.13 43.13,1.22 44.81,1.22 45.11,1.52 45.11,1.68 48.01,4.57 48.01,6.86 CAL-15-R1.1 48.16,7.01 48.16,12.34 48.77,12.95 51.05,12.95 51.66,12.34 55.17,12.34 | 19.2,10.52 16.61,7.92 16.61,7.32 3VSUP-BYP.2 | 21.49,15.39 17.83,15.39 17.53,15.09 17.53,12.19 19.2,10.52 | INPUT-BYP.2 6.86,17.98 3.35,17.98 3.2,17.83 X2.2 | 7.01,21.64 11.43,26.06 14.78,26.06 14.94,25.91 16.46,25.91 -3VSUP-BYP.1 | 7.01,21.64 7.01,18.14 INPUT-BYP.2 | 9.14,30.48 9.91,29.72 12.95,29.72 -3VSUP.3 | 9.14,30.48 2.59,30.48 2.44,30.33 2.44,24.38 5.18,21.64 7.01,21.64 | 25.76,44.2 26.67,44.2 26.82,44.35 27.58,44.35 30.02,41.91 POT1-BYP.2 30.18,41.91 30.33,42.06 v31.39,42.06 | CAL-1-R1.1 5.64,87.63 5.64,83.21 WB1-R1.1 5.64,83.06 6.25,83.06 9.75,79.55 9.75,71.78 11.12,70.41 13.11,70.41 | 13.11,72.85 12.95,73 11.58,73 10.36,74.22 10.36,79.86 11.89,81.38 11.89,83.06 WB1-R2.1 | 13.11,70.41 13.11,68.43 12.04,67.36 WB1-A-R4.1 12.04,67.21 12.04,65.68 14.78,62.94 WB1-A-C1.2 14.94,62.79 14.94,53.34 16.76,51.51 | 13.11,70.41 13.11,72.85 | 25.76,44.2 24.08,44.2 16.76,51.51 | 25.76,44.2 POT-1.10 | 9.14,30.48 9.14,45.87 14.02,50.75 16,50.75 16.76,51.51
  Top 0.152: 13.11,72.85 v13.26,73 | v104.24,65.53 103.48,66.29 103.48,67.21 WB7-A-R4.1 | WB7-A-C1.2 106.22,62.94 105.92,63.25 v105.92,64.47 111.25,64.47 112.78,65.99 113.08,65.99 113.69,66.6 113.69,68.58 115.52,70.41 115.98,70.41 116.13,70.56 116.13,73 113.84,75.29 | 113.84,75.29 107.44,75.29 105,77.72 105,79.25 103.48,80.77 103.48,83.06 WB7-R2.1 | 113.84,75.29 116.13,77.57 116.13,79.86 112.93,83.06 112.32,83.06 WB8-R1.1 112.32,83.21 112.32,87.63 CAL-8-R1.1 | 80.47,84.43 74.68,84.43 73.46,83.21 73,83.21 WB5-R2.1 | 80.47,84.43 81.69,83.21 WB6-R1.1 81.84,83.06 81.84,82.45 v82.75,81.53 | 80.47,84.43 81.69,85.65 81.69,87.63 CAL-6-R1.1 | 97.08,84.43 97.08,87.63 CAL-7-R1.1 | 97.08,84.43 97.08,83.21 WB7-R1.1 | 85.95,80.92 85.95,80.16 86.26,79.86 86.87,79.86 87.02,80.01 89,80.01 89.31,79.7 89.31,70.71 88.24,69.65 88.24,67.36 WB6-A-R4.1 | 85.95,80.92 88.09,83.06 WB6-R2.1 88.24,83.21 89.46,84.43 97.08,84.43 | 85.95,80.92 v85.34,81.53 | 81.69,21.95 81.69,22.4 81.38,22.71 80.92,22.71 ATMEGA328.3 80.77,22.71 80.16,22.71 71.17,13.72 71.17,12.95 CRYSTAL-C1.1 71.02,12.8 69.8,11.58 69.8,4.72 70.87,3.66 71.48,3.66 71.93,4.12 71.93,7.77 76.2,12.04 CRYSTAL-C2.1 | 81.69,21.95 81.69,21.64 81.38,21.34 80.92,21.34 ATMEGA328.5 | 81.69,21.95 89.31,21.95 ATMEGA328.21 89.46,22.1 90.07,22.1 v90.68,22.71 | 57.76,81.08 57.76,80.77 59.28,79.25 59.28,77.72 59.59,77.42 61.27,77.42 62.18,78.33 | 57.76,81.08 57.76,83.06 WB4-R2.1 | 62.18,78.33 66.45,82.6 66.45,83.06 WB5-R1.1 66.6,83.21 66.6,87.63 CAL-5-R1.1 | v93.27,14.17 93.27,19.51 ATMEGA328-BYP.1 | 87.02,54.71 87.02,58.83 90.98,62.79 WB6-A-C1.2 91.14,62.94 91.44,63.25 v91.44,64.47
  Top 0.152: 87.02,54.71 87.02,51.05 88.09,49.99 89.15,49.99 POT-2.15 | 75.74,64.47 75.74,62.94 WB5-A-C1.2 75.89,62.79 75.89,59.74 81.38,54.25 81.38,47.85 81.99,47.24 83.52,47.24 POT-2.10 83.67,47.09 83.67,44.2 84.12,43.74 86.56,43.74 87.78,44.96 POT2-BYP.2 87.94,44.96 88.39,44.5 89.31,44.5 | 75.74,64.47 73,67.21 WB5-A-R4.1 | SHREG-BYP.2 91.44,32.46 91.14,32.16 | 91.14,32.16 89,30.02 SHREG.12 | v99.97,47.55 99.97,47.4 99.36,46.79 98.6,46.79 AMP-2.8 | v101.96,46.63 103.33,46.63 AMP-2.9 | v90.83,45.11 90.22,44.5 89.31,44.5 | v91.29,32 91.14,32.16 | 87.02,54.71 89.31,54.71 91.75,52.27 91.75,48.92 91.44,48.62 91.44,47.55 89.31,45.41 89.31,44.5 | 62.18,78.33 65.38,75.13 65.38,70.71 65.68,70.41 67.36,70.41 68.28,71.32 68.28,72.85 68.43,73 70.26,73 71.78,71.48 71.78,70.71 73.3,69.19 76.05,69.19 77.42,67.82 77.42,65.53 76.35,64.47 75.74,64.47 | 126.19,84.43 120.4,84.43 119.18,83.21 118.72,83.21 WB8-R2.1 | 126.19,84.43 127.41,83.21 WB9-R1.1 127.56,83.06 128.17,83.06 132.13,79.1 132.13,71.32 133.96,69.49 | 126.19,84.43 127.41,85.65 127.41,87.63 CAL-9-R1.1 | WB10-R1.1 142.19,83.21 142.8,83.21 144.02,84.43 147.22,84.43 148.44,83.21 WB10-R2.1 148.59,83.06 149.2,83.06 150.42,81.84 151.33,81.84 | 133.96,69.49 133.96,69.65 135.03,70.71 135.03,75.29 132.74,77.57 132.74,80.01 | 133.96,69.49 133.96,67.36 WB9-A-R4.1 | 132.74,80.01 132.74,81.99 133.2,82.45 | 133.2,82.45 133.81,83.06 WB9-R2.1 | 132.74,80.01 134.72,80.01 135.03,79.7 135.03,77.27 137.77,74.52 137.77,66.29 136.85,65.38 136.85,62.94 WB9-A-C1.2 | CAL-10-R1.1 138.84,87.63 132.59,93.88 131.06,93.88 129.24,92.05 129.24,86.41 133.2,82.45
  Top 0.152: 133.2,82.45 WB9-R2.1 | 151.33,81.84 152.09,81.84 152.4,82.14 152.4,84.28 151.64,85.04 135.79,85.04 133.96,83.21 WB9-R2.1 | 180.29,65.68 180.29,67.21 WB12-A-R4.1 | 181.97,64.01 183.03,62.94 WB12-A-C1.2 | 181.97,64.01 180.29,65.68 | 181.97,64.01 184.1,66.14 184.1,79.86 183.95,80.01 181.97,80.01 180.29,81.69 180.29,83.06 WB12-R2.1 | 168.25,72.69 168.25,63.86 167.34,62.94 WB11-A-C1.2 | 168.25,72.69 168.25,72.85 168.1,73 166.12,73 165.96,72.85 165.96,70.71 164.44,69.19 164.44,67.36 WB11-A-R4.1 | WB10-A-C1.2 151.33,62.94 151.33,64.47 148.59,67.21 WB10-A-R4.1 148.59,67.36 v148.59,70.1 | 158.04,83.21 158.04,87.63 CAL-11-R1.1 | CAL-12-R1.1 173.89,87.63 173.89,83.21 WB12-R1.1 173.89,83.06 174.5,83.06 177.7,79.86 177.7,77.57 174.04,73.91 167.03,73.91 163.22,77.72 163.22,79.86 164.29,80.92 164.29,83.06 WB11-R2.1 164.29,83.21 v162.92,83.21 | v159.41,83.21 158.04,83.21 | 158.04,83.21 WB11-R1.1 | v168.55,72.69 168.25,72.69 | 180.29,65.68 177.39,65.68 v177.09,65.38 | 155.75,6.1 155.75,33.07 154.69,34.14 SD-SOCKET.SH@1 | 146,44.65 145.39,44.65 144.93,44.2 143.26,44.2 POT-3.10 143.1,44.04 121.46,44.04 | 146,44.65 147.52,43.13 147.52,41.91 POT3-BYP.2 | 146,44.65 146.3,44.96 146.3,45.87 147.07,46.63 148.74,46.63 POT-3.15 148.9,46.63 153.62,46.63 154.08,46.18 160.02,46.18 AMP-3.8 160.17,46.02 v161.54,46.02 | v162.76,46.02 164.9,46.02 AMP-3.9 | WB8-A-R4.1 118.72,67.21 121.46,64.47 121.46,62.94 WB8-A-C1.2 121.46,62.79 121.46,44.04 | SD-SOCKET.3 133.5,22.1 128.47,22.1 128.32,21.95 SD-BYP.2 128.17,21.95 125.88,21.95 124.36,23.47 120.7,23.47 | 124.66,16.46 124.66,14.02 LSHIFT-1.7 124.66,13.87 123.14,12.34 123.14,9.91 120.55,7.32 120.55,3.2
  Top 0.152: 124.66,16.46 123.44,17.68 LSHIFT1-BYP-2.2 123.29,17.83 120.55,20.57 120.55,22.1 LSHIFT2-BYP-1.2 120.55,22.25 120.7,22.4 120.7,23.47 | 124.66,16.46 125.42,17.22 134.57,17.22 134.87,16.92 134.87,16 133.66,14.78 133.66,14.02 SD-SOCKET.6 | 120.55,3.2 120.55,2.59 LSHIFT1-BYP-1.2 | 120.7,23.47 120.7,29.72 123.9,32.92 124.05,32.92 124.66,33.53 LSHIFT-2.7 124.66,33.68 124.66,36.12 123.44,37.34 LSHIFT2-BYP-2.2 123.29,37.49 121.46,39.32 121.46,44.04 | 155.75,6.1 134.87,6.1 130,1.22 121.77,1.22 120.55,2.44 LSHIFT1-BYP-1.2 | 155.75,6.1 SD-SOCKET.SH@2 | v151.33,81.53 151.33,81.84 | ICSP.6 91.44,6.25 90.22,5.03 90.22,3.96 90.98,3.2 120.55,3.2 | 120.55,3.2 LSHIFT1-BYP-1.2 | 57.76,81.08 v56.08,81.08
  Bottom 0.152: v29.41,64.47 28.96,64.47 v27.74,65.68 27.74,73 | v27.28,81.38 27.28,81.08 27.74,80.62 | 27.74,73 27.74,80.62 | 27.74,80.62 32.77,80.62 v38.1,85.95 43.28,85.95 48.92,80.31 55.32,80.31 v56.08,81.08 | v42.22,44.04 v40.23,42.06 v31.39,42.06 | v13.26,73 27.74,73 | v105.92,64.47 104.85,65.53 v104.24,65.53 94.64,65.53 92.96,63.86 92.35,63.86 91.59,64.62 | v82.75,81.53 v85.34,81.53 86.41,81.53 87.63,80.31 87.63,68.58 91.59,64.62 | ICSP.6 91.44,7.01 93.27,8.84 v93.27,14.17 93.27,20.73 90.98,23.01 | v99.97,47.55 100.89,46.63 101.5,46.63 | v101.96,46.63 101.5,46.63 | 101.5,46.63 101.5,45.41 101.19,45.11 91.29,45.11 | v90.83,45.11 91.29,45.11 | 91.29,45.11 91.29,36.58 | 91.29,36.58 v91.29,32 | 90.98,23.01 89.46,24.54 89.46,35.05 88.85,35.66 88.85,36.27 89.15,36.58 91.29,36.58 | 90.98,23.01 v90.68,22.71 | v91.44,64.47 91.59,64.62 | v148.59,70.1 148.59,72.39 154.53,78.33 | 154.53,78.33 v159.41,83.21 v162.92,83.21 163.37,83.21 168.55,78.03 v168.55,72.69 175.87,65.38 176.78,65.38 | v161.54,46.02 v162.76,46.02 163.07,46.33 163.07,50.44 176.78,64.16 176.78,65.38 | 176.78,65.38 v177.09,65.38 | 154.53,78.33 v151.33,81.53
LSHIFT-OE  (via drill 0.35)
  Top 0.152: v119.02,24.54 119.02,14.02 LSHIFT-1.8 | v117.96,32.46 119.02,33.53 LSHIFT-2.8 | v86.56,2.44 82.3,6.71 82.3,17.22 ATMEGA328.9
  Bottom 0.152: v117.96,32.46 119.02,31.39 v119.02,24.54 96.01,1.52 89.15,1.52 88.24,2.44 v86.56,2.44
MISO  (via drill 0.35)
  Top 0.152: v87.78,14.33 87.78,17.22 ATMEGA328.16
  Bottom 0.152: v87.78,14.33 87.78,7.62 87.63,7.47 87.63,5.79 86.41,4.57 ICSP.1
MOSI
  Top 0.152: ATMEGA328.15 87.17,17.22 87.17,14.02 88.85,12.34 88.85,7.01 ICSP.4
N$1
  Top 0.152: -3VSUP-D1.A 26.52,24.84 26.52,26.98 29.26,29.72 -3VSUP-R3.2
N$2
  Top 0.152: -3VSUP-R1.1 19.66,29.72 22.25,27.13 22.25,24.84 -3VSUP-R2.2 22.25,24.69 21.03,23.47 16.76,23.47 15.24,24.99 13.11,24.99 -3VSUP.1
N$5  (via drill 0.35)
  Top 0.152: v82.3,22.71 89.31,22.71 ATMEGA328.22 | v41.15,25.45 36.42,25.45 23.47,38.41 21.79,38.41 21.64,38.56 POT-WP-R1.2
  Bottom 0.152: v82.3,22.71 71.78,22.71 66.14,17.07 63.09,17.07 54.71,25.45 v41.15,25.45
N$12
  Top 0.152: 19.51,7.62 19.51,8.23 3VSUP-R1.1 19.51,7.62 | 19.51,7.62 17.22,5.33 14.94,5.33 13.11,3.5 3VSUP.1 | 19.51,7.62 20.12,7.01 27.43,7.01 28.65,8.23 29.26,8.23 3VSUP-R2.2
N$13
  Top 0.152: LSHIFT-2.4 124.82,29.72 130.3,29.72 133.5,26.52 SD-SOCKET.1
N$14
  Top 0.152: 5VSUP-R1.1 28.65,16.31 28.65,14.02 5VSUP-R2.2 28.65,13.87 27.43,12.65 22.55,12.65 21.03,14.17 19.51,14.17 5VSUP.1
N$15  (via drill 0.35)
  Top 0.152: v127.41,24.69 124.82,27.28 LSHIFT-2.2 | v128.32,8.38 131.83,8.38 133.5,6.71 SD-SOCKET.WP
  Bottom 0.152: v127.41,24.69 127.41,9.3 v128.32,8.38
N$17
  Top 0.152: LSHIFT-2.3 124.82,28.5 129.84,28.5 133.66,24.69 134.57,24.69 134.87,24.38 134.87,21.64 133.96,20.73 133.66,20.73 SD-SOCKET.CD
N$18
  Top 0.152: LSHIFT-2.5 124.66,31.09 124.21,31.09 123.44,30.33 123.44,26.06 125.42,24.08 133.5,24.08 SD-SOCKET.2
N$19
  Top 0.152: ATMEGA328.7 80.77,19.51 80.16,19.51 71.17,10.52 71.17,10.06 CRYSTAL-C1.2 71.17,9.91 71.17,5.18 CRYSTAL.2
N$20
  Top 0.152: ATMEGA328.8 80.77,18.75 80.77,14.63 76.2,10.06 CRYSTAL-C2.2 CRYSTAL.1
N$21
  Top 0.152: LSHIFT-1.2 124.21,7.62 123.44,8.38 123.44,11.43 124.05,12.04 129.24,12.04 133.5,16.31 SD-SOCKET.5
N$22
  Top 0.152: LSHIFT-1.3 124.82,8.99 134.57,8.99 135.48,9.91 135.48,26.98 133.66,28.8 SD-SOCKET.9
N$23
  Top 0.152: LSHIFT-1.4 124.82,10.06 133.35,10.06 133.5,9.91 SD-SOCKET.8
N$24
  Top 0.152: LSHIFT-1.5 133.5,11.43 SD-SOCKET.7
N$25
  Top 0.152: CAL-1.P$4 10.52,92.81 10.52,93.12 10.06,93.57 9.3,93.57 8.53,92.81 8.53,87.63 CAL-1-R1.2
N$26
  Top 0.152: CAL-1.P$3 9.75,92.66 9.75,92.51 10.21,92.05 10.97,92.05 14.63,88.39 14.63,87.63 CAL-1-R2.2
N$27  (via drill 0.35)
  Top 0.152: 11.89,87.63 10.67,88.85 10.67,91.29 CAL-1.P$2 | v81.84,31.55 82.45,30.94 82.45,30.02 SHREG.7 | v71.48,27.89 71.48,27.43 66.75,22.71 66.75,17.98 66.45,17.68 43.74,17.68 23.93,37.49 20.57,37.49 v11.12,46.94 | 11.89,87.63 v10.52,86.26 | 11.89,87.63 CAL-1-R2.1
  Bottom 0.152: v81.84,31.55 75.44,31.55 71.78,27.89 v71.48,27.89 | v11.12,46.94 11.12,64.77 5.94,69.95 5.94,81.69 v10.52,86.26
N$28  (via drill 0.35)
  Top 0.152: v94.94,33.83 101.35,27.43 119.02,27.43 LSHIFT-2.13 | v93.12,33.83 92.51,34.44 v86.87,34.44 | v81.99,24.08 81.53,23.62 80.92,23.62 ATMEGA328.2
  Bottom 0.152: v93.12,33.83 v94.94,33.83 | v86.87,34.44 85.8,33.38 85.8,27.89 v81.99,24.08
N$29  (via drill 0.35)
  Top 0.152: v116.59,28.5 119.02,28.5 LSHIFT-2.12 | v94.94,28.5 94.03,28.5 93.57,28.04 v88.85,28.04 | v84.43,24.54 83.97,24.54 83.21,25.3 83.21,25.76 ATMEGA328.31
  Bottom 0.152: v94.94,28.5 v116.59,28.5 | v88.85,28.04 85.34,24.54 v84.43,24.54
N$30  (via drill 0.35)
  Top 0.152: v84.28,35.97 84.73,35.97 86.56,37.8 92.2,37.8 100.13,29.87 119.02,29.87 LSHIFT-2.11 | v83.67,31.55 83.21,31.09 83.21,27.13 83.82,26.52 83.82,25.91 ATMEGA328.30
  Bottom 0.152: v84.28,35.97 84.28,35.51 84.58,35.2 84.58,32.46 v83.67,31.55
N$31  (via drill 0.35)
  Top 0.152: v117.96,30.48 118.57,31.09 119.02,31.09 LSHIFT-2.10 | v89.76,3.2 88.39,3.2 87.63,3.96 87.63,4.88 86.72,5.79 85.8,5.79 85.19,6.4 85.19,12.34 v85.8,12.95 | v86.41,16 86.41,17.22 ATMEGA328.14
  Bottom 0.152: v117.96,30.48 117.96,28.96 92.2,3.2 v89.76,3.2 | v85.8,12.95 85.8,13.41 86.11,13.72 86.11,15.7 v86.41,16
N$32  (via drill 0.35)
  Top 0.152: v103.02,7.62 LSHIFT-1.13 | v85.5,15.54 85.5,17.22 ATMEGA328.13
  Bottom 0.152: v103.02,7.62 102.56,7.62 96.16,1.22 86.87,1.22 84.73,3.35 84.73,14.78 v85.5,15.54
N$33  (via drill 0.35)
  Top 0.152: v91.75,11.28 94.03,8.99 119.02,8.99 LSHIFT-1.12 | v87.02,13.26 85.34,14.94 85.19,14.94 84.73,15.39 84.73,17.22 ATMEGA328.12
  Bottom 0.152: v91.75,11.28 88.09,14.94 87.48,14.94 87.02,14.48 v87.02,13.26
N$34  (via drill 0.35)
  Top 0.152: v96.32,10.06 119.02,10.06 LSHIFT-1.11 | v85.34,13.87 85.34,14.33 83.97,15.7 83.97,17.22 ATMEGA328.11
  Bottom 0.152: v96.32,10.06 91.9,5.64 88.39,5.64 87.63,4.88 87.63,3.96 86.87,3.2 85.8,3.2 85.19,3.81 85.19,13.72 v85.34,13.87
N$35  (via drill 0.35)
  Top 0.152: LSHIFT-1.10 95.1,11.43 v91.9,14.63 | v88.85,17.68 88.24,18.29 83.52,18.29 83.21,17.98 83.21,17.37 ATMEGA328.10
  Bottom 0.152: v88.85,17.68 v91.9,14.63
N$36
  Top 0.152: ATMEGA328.26 87.02,25.91 87.02,31.55 84.28,34.29 84.28,34.75 83.97,35.05 81.53,35.05 81.23,34.75 81.23,30.02 SHREG.6
N$37
  Top 0.152: SHREG.2 76.2,28.96 76.81,28.35 78.18,28.35 81.53,24.99 81.99,24.99 83.36,23.62 89.31,23.62 ATMEGA328.23
N$38  (via drill 0.35)
  Top 0.152: v90.68,24.23 90.53,24.38 89.46,24.38 ATMEGA328.24 | v88.24,37.19 v89.46,35.97 | v84.89,49.38 v86.87,47.4 | v80.16,51.82 80.16,48.77 v78.49,47.09 | v80.62,32.16 80.62,30.63 80.01,30.02 SHREG.5
  Bottom 0.152: v90.68,24.23 90.68,34.75 v89.46,35.97 | v88.24,37.19 88.24,46.02 v86.87,47.4 | v84.89,49.38 82.45,51.82 v80.16,51.82 | v78.49,47.09 78.49,45.57 82.14,41.91 82.14,35.05 82.45,34.75 82.45,33.98 v80.62,32.16
N$39  (via drill 0.35)
  Top 0.152: v87.94,28.19 87.94,25.91 ATMEGA328.25 | v85.8,37.95 82.75,37.95 81.84,38.86 81.84,41.15 81.69,41.3 78.33,41.3 78.03,41 78.03,31.39 77.57,30.94 77.57,30.02 SHREG.3
  Bottom 0.152: v87.94,28.19 87.94,34.59 88.24,34.9 88.24,35.51 v85.8,37.95
N$40
  Top 0.152: ATMEGA328.19 89.31,20.27 83.97,20.27 81.08,17.37 81.08,8.23 76.2,3.35 70.71,3.35 69.49,4.57 69.49,24.54 74.83,29.87 SHREG.1
N$41
  Top 0.152: CAL-2.P$4 25.76,92.81 25.76,93.12 25.3,93.57 24.54,93.57 23.77,92.81 23.77,87.63 CAL-2-R1.2
N$42
  Top 0.152: CAL-2.P$3 24.99,92.66 24.99,92.51 25.45,92.05 26.21,92.05 29.87,88.39 29.87,87.63 CAL-2-R2.2
N$43
  Top 0.152: 3VSUP-D1.A 26.36,3.2 22.4,3.2 3VSUP-R3.2
N$44
  Top 0.152: 5VSUP-D1.A 32.92,14.02 32.92,16.31 35.66,19.05 5VSUP-R3.2
N$45  (via drill 0.35)
  Top 0.152: 26.52,88.24 27.13,87.63 CAL-2-R2.1 26.52,88.24 | 26.52,88.24 25.91,88.85 25.91,91.29 CAL-2.P$2 | v83.82,28.19 SHREG.8 | v16.46,62.03 16.46,74.83 13.56,77.72 13.56,79.7 15.39,81.53 15.7,81.53 18.75,84.58 18.75,87.78 19.96,89 21.64,89 22.55,88.09 22.55,86.56 22.86,86.26 24.54,86.26 26.52,88.24
  Bottom 0.152: v83.82,28.19 80.47,24.84 55.78,24.84 54.56,26.06 40.84,26.06 23.77,8.99 20.27,8.99 19.2,10.06 19.2,46.48 14.78,50.9 14.78,60.35 v16.46,62.03
N$46
  Top 0.152: CAL-5.P$4 71.48,92.81 71.48,93.12 71.02,93.57 70.26,93.57 69.49,92.81 69.49,87.63 CAL-5-R1.2
N$47